# Altium PCB AMS_Slave_Passiv_V2.PcbDoc (part 1 of 2)
Units mm, origin at the board's own origin, x right, y up, seen from the top; angles counter-clockwise.
Board outline 190.4 x 70.05 mm, 4 copper layers (Top Layer, Int1, Int2, Bottom Layer), stack 1.369 mm thick; 116 components, 109 nets, 357 pads, 142 vias.
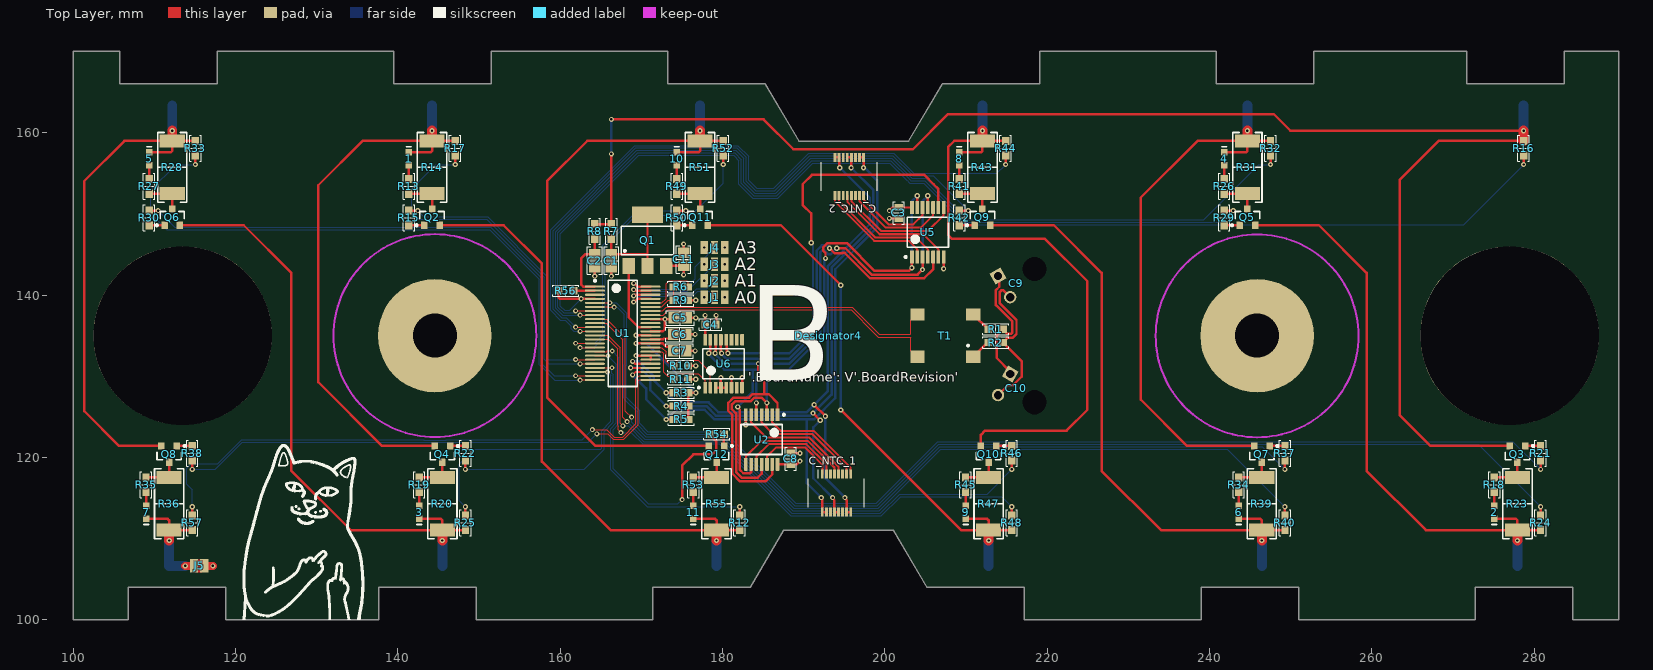
[diagram p0: Top Layer view]
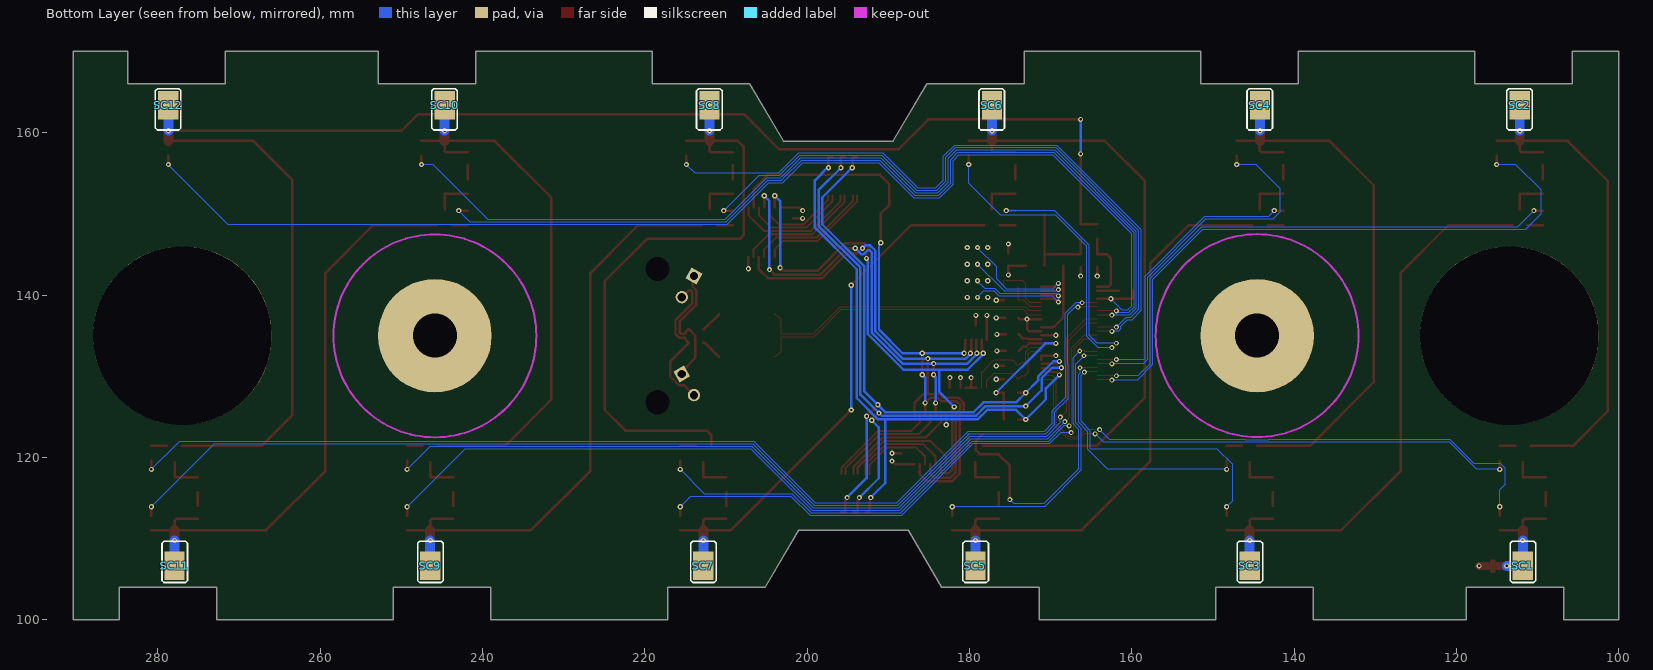
[diagram p1: Bottom Layer view, seen from below]
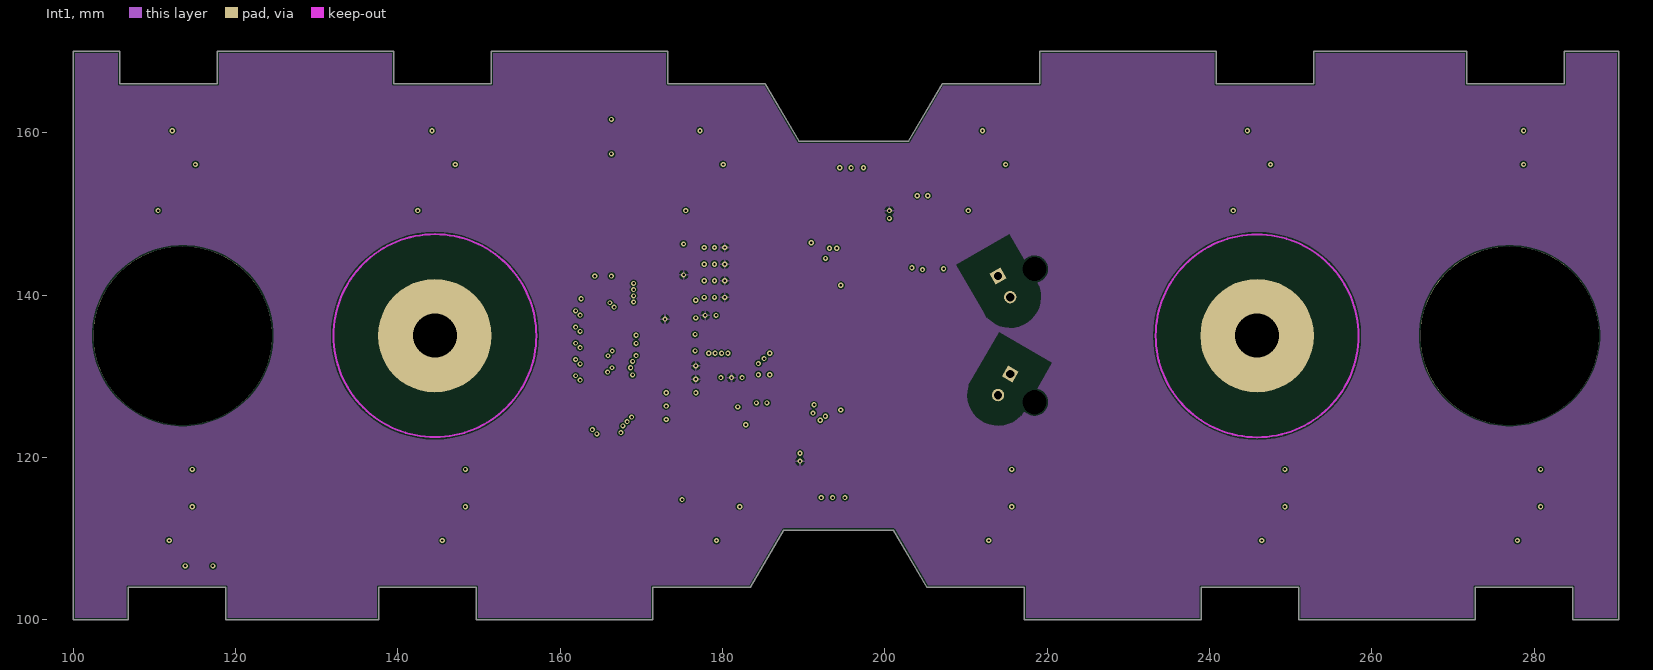
[diagram p2: Int1]
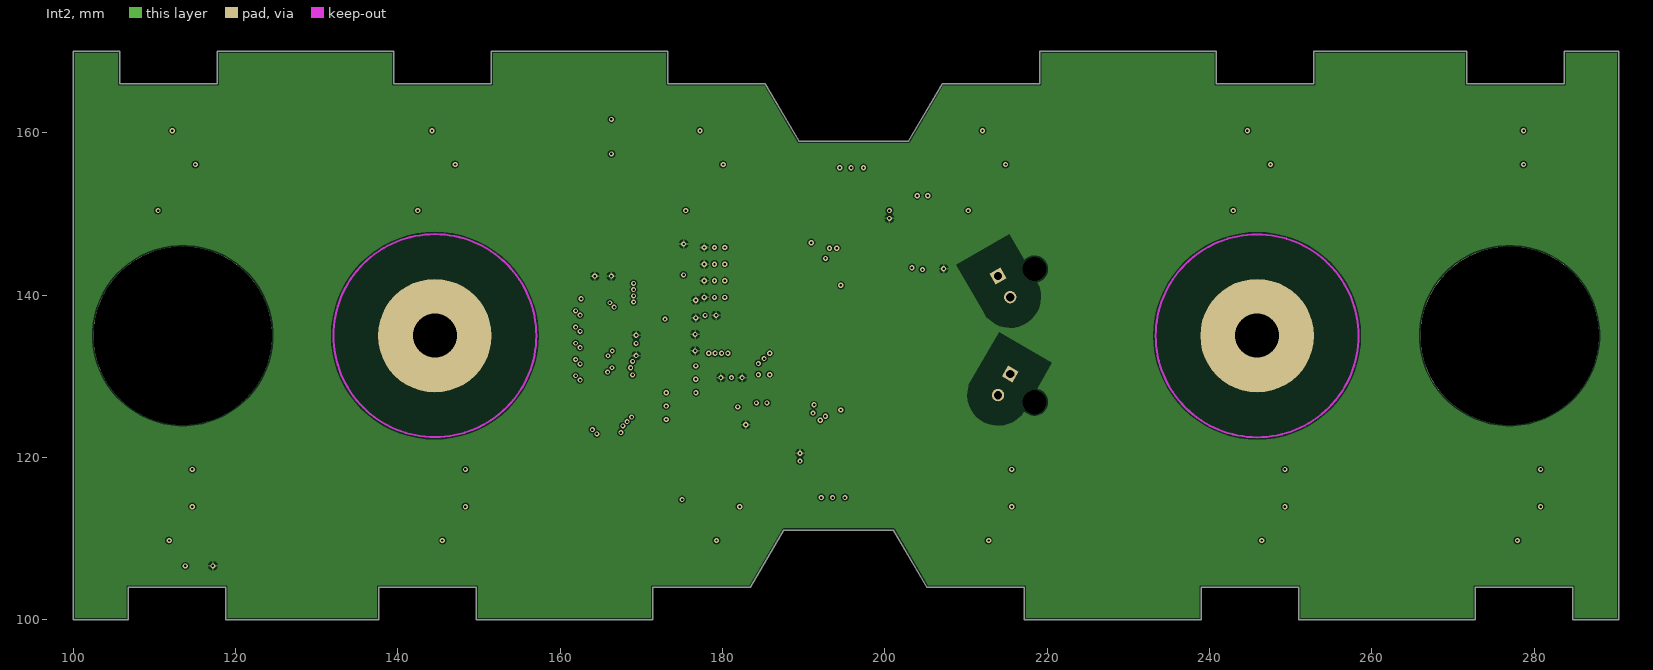
[diagram p3: Int2]
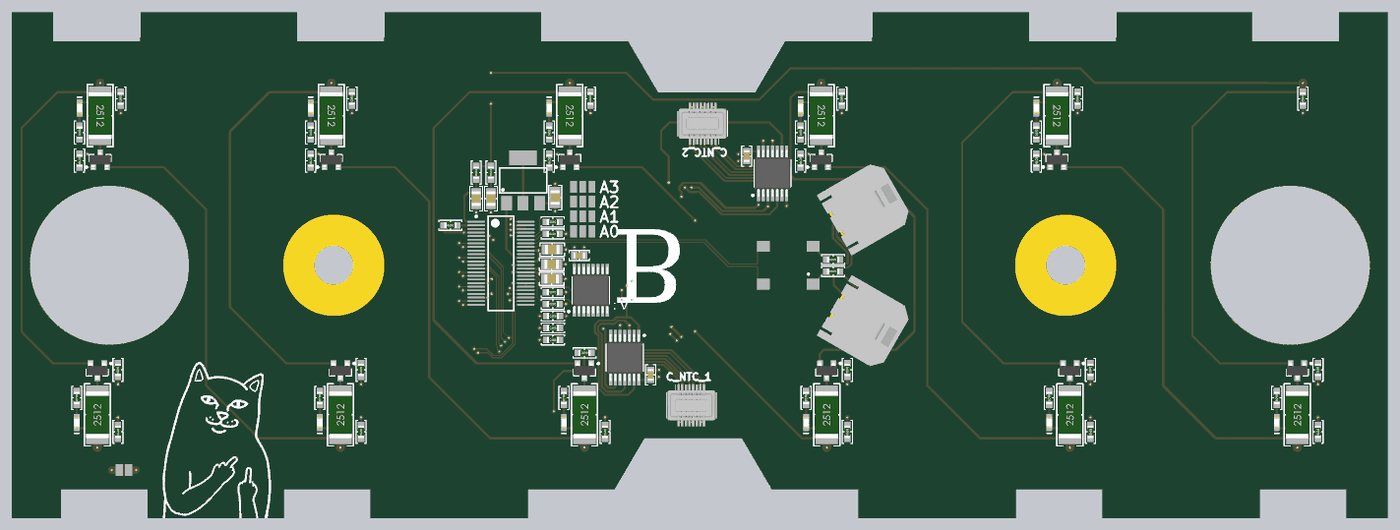
[diagram p5: 3D render of the assembled board from above, using the file's embedded part models]

## Layer stack, top to bottom
Top Solder: solder mask 0.0254, SM-001, Dk 4
Top Layer: signal copper 0.035
Dielectric 1: prepreg 0.1295, PP-017, Dk 4.3
Dielectric 2: prepreg 0.1295, PP-017, Dk 4.3
Int1: signal copper 0.035
Dielectric 3: core 0.7112, Core-039, Dk 4.8
Int2: signal copper 0.035
Dielectric 4: prepreg 0.1295, PP-017, Dk 4.3
Dielectric 5: prepreg 0.1295, PP-017, Dk 4.3
Bottom Layer: signal copper 0.035
Bottom Solder: solder mask 0.0254, SM-001, Dk 4

## Board outline
100,100 106.767,100 106.767,104 118.767,104 118.767,100 137.63,100 137.63,104 149.63,104 149.63,100 171.404,100 171.404,104 183.404,104 187.541,111.07 201.041,111.07 205.178,104 217.178,104 217.178,100 238.952,100 238.952,104 250.952,104 250.952,100 272.726,100 272.726,104 284.726,104 284.726,100 290.4,100 290.4,170.05 283.663,170.05 283.663,166.05 271.664,166.05 271.664,170.05 252.816,170.05 252.816,166.05 240.816,166.05 240.816,170.05 219.042,170.05 219.042,166.05 207.042,166.05 202.905,158.98 189.405,158.98 185.268,166.05 173.268,166.05 173.268,170.05 151.494,170.05 151.494,166.05 139.494,166.05 139.494,170.05 117.72,170.05 117.72,166.05 105.72,166.05 105.72,170.05 100,170.05

## Design rules (kind name [scope] priority, off if disabled: settings)
AcuteAngle [All] p1: minimum=4.50000000000000E+0001 checktracksonly=TRUE
BoardOutlineClearance [All] p1: gap=0.254 ignorepadtopadclearanceinfootprint=FALSE except(0: Arc-SplitContinuation Track-SplitContinuation SMDPad-SplitContinuation THPad-SplitContinuation Via-SplitContinuation Fill-SplitContinuation Poly-SplitContinuation Region-SplitContinuation Text-SplitContinuation)
Clearance Clearance_isoSPI [InNet('isoSPI_iso*') vs Not InNet('isoSPI_iso*') And InAnyNet] p1: gap=3 ignorepadtopadclearanceinfootprint=FALSE
Clearance [All] p2: gap=0.152 ignorepadtopadclearanceinfootprint=FALSE
ComponentClearance [All] p1: gap=0.1 collisioncheckmode=3 verticalgap=0.254 showdistances=FALSE
DiffPairsRouting [All] p1: maxlimit=0.254 minlimit=0.2 mostfreqgap=0.2 toplayer_minwidth=0.152 toplayer_maxwidth=0.381 toplayer_prefwidth=0.305 midlayer1_minwidth=0.152 midlayer1_maxwidth=0.381 midlayer1_prefwidth=0.305 midlayer2_minwidth=0.152 midlayer2_maxwidth=0.381 midlayer2_prefwidth=0.305 bottomlayer_minwidth=0.152 bottomlayer_maxwidth=0.381 bottomlayer_prefwidth=0.305 maxuncoupledlength=12.7
HoleSize [All] p1: absolutevalues=TRUE maxlimit=7 minlimit=0.2 maxpercent=80.000 minpercent=20.000
MinimumAnnularRing [All] p1: minimumring=0.17
MinimumSolderMaskSliver [All] p1: minsoldermaskwidth=0.1
PolygonConnect [All] p1: connectstyle=Relief reliefconductorwidth=0.254 reliefentries=4 polygonreliefangle="90 Angle" airgapwidth=0.254
RoutingVias [All] p1: holewidth=0.3 width=0.64 viastyle="Through Hole" minholewidth=0.3 minwidth=0.61 maxholewidth=0.711 maxwidth=1.27
SMDEntry [not IsRoundPad] p1: side=TRUE corner=TRUE anyangle=TRUE
SMDToCorner [All] p1: distance=60000
SilkToSilkClearance [All] p1: silktosilkclearance=0.2
SilkToSolderMaskClearance [IsPad] p1: minsilkscreentomaskgap=0.3 clearancetoexposedcopper=TRUE
SolderMaskExpansion SolderMaskExpansion_ViaTenting [IsVia] p1: expansion=0 istentingtop=TRUE
SolderMaskExpansion [All] p2: expansion=0 istentingtop=FALSE
UnRoutedNet [All] p1: checkbadconnections=TRUE
Width [All] p1: maxlimit=1.219 minlimit=0.152 preferedwidth=0.305
23 further rules are at their usual default settings.

## Classes and differential pairs
component class AMS_Slave_Measurement: 1 2 3 4 5 6 7 8 9 10 11 J5 Q2 Q3 Q4 Q5 Q6 Q7 Q8 Q9 Q10 Q11 Q12 R12 R13 R14 R15 R16 R17 R18 R19 R20 R21 R22 R23 R24 R25 R26 R27 R28 R29 R30 R31 R32 R33 R34 R35 R36 R37 R38 R39 R40 R41 R42 R43 R44 R45 R46 R47 R48 R49 R50 R51 R52 R53 R54 R55 R56 R57
component class AMS_Slave_Inputs: C9 C10 C_NTC_1 C_NTC_2 SC1 SC2 SC3 SC4 SC5 SC6 SC7 SC8 SC9 SC10 SC11 SC12
component class AMS_Slave_Controller: C1 C2 C3 C4 C5 C6 C7 C8 C11 J1 J2 J3 J4 Q1 R1 R2 R3 R4 R5 R6 R7 R8 R9 R10 R11 T1 U1 U2 U5 U6
differential pair isoSPI_iso: +isoSPI_iso_P -isoSPI_iso_N
differential pair isoSPIonboard: +isoSPIonboard_P -isoSPIonboard_N

## Components (designator, comment, footprint, x,y, rotation, side; value= is the part's Value field where it differs from the comment)
1 "150060GS75000" 0603_A 141.346,156.801 r270 top
2 "150060GS75000" 0603_A 275.077,113.249 r90 top
3 "150060GS75000" 0603_A 142.616,113.249 r90 top
4 "150060GS75000" 0603_A 241.803,156.801 r270 top
5 "150060GS75000" 0603_A 109.342,156.801 r270 top
6 "150060GS75000" 0603_A 243.581,113.249 r90 top
7 "150060GS75000" 0603_A 108.961,113.249 r90 top
8 "150060GS75000" 0603_A 209.164,156.801 r270 top
9 "150060GS75000" 0603_A 209.926,113.249 r90 top
10 "150060GS75000" 0603_A 174.366,156.801 r270 top
11 "150060GS75000" 0603_A 176.398,113.249 r90 top
C1 "SMD Capacitor" "CAP 0805/2012" 166.294,144.256 r90 top value=100n
C2 "SMD Capacitor" "CAP 0805/2012" 164.244,144.256 r90 top value=100n
C3 "SMD Capacitor" "CAP 0603/1608" 201.695,150.13 r90 top value=100n
C4 "SMD Capacitor" "CAP 0603/1608" 178.519,136.369 r180 top value=100n
C5 "SMD Capacitor" "CAP 0805/2012" 174.778,137.203 r0 top value=1u
C6 "SMD Capacitor" "CAP 0805/2012" 174.702,135.171 r0 top value=1u
C7 "SMD Capacitor" "CAP 0805/2012" 174.702,133.139 r0 top value=1u
C8 "SMD Capacitor" "CAP 0603/1608" 188.392,119.847 r270 top value=100n
C9 "43045-0200" 43650-0200 214.68,141.06 r120 top
C10 "43045-0200" 43650-0200 214.68,128.99 r60 top
C11 "SMD Capacitor" "CAP 0805/2012" 175.195,144.406 r90 top value=1u
C_NTC_1 "541020164" 541020164 192.278,115.57 r0 top
C_NTC_2 "541020164" 541020164 197.358,154.686 r180 top
Designator4 "Comment" LOGO_BALTIC_20mm 193.027,135.025 r0 top
J1 "A0" SMD-JUMPER-3 179.002,139.725 r0 top
J2 "A1" SMD-JUMPER-3 179.002,141.775 r0 top
J3 "A2" SMD-JUMPER-3 179.002,143.825 r0 top
J4 "A3" SMD-JUMPER-3 179.002,145.876 r0 top
J5 "SMD Jumper closed" SMD-JUMPER-CLOSED 115.5,106.65 r180 top net-tie
Q1 "NSV1C201MZ4T1G" ONSC-SOT-223-4-318E-04_V 170.744,146.756 r90 top
Q2 "DMP3098L-7" DIOD-SOT23-3_V 144.196,149.619 r90 top
Q3 "DMP3098L-7" DIOD-SOT23-3_V 277.927,120.431 r270 top
Q4 "DMP3098L-7" DIOD-SOT23-3_V 145.466,120.431 r270 top
Q5 "DMP3098L-7" DIOD-SOT23-3_V 244.653,149.619 r90 top
Q6 "DMP3098L-7" DIOD-SOT23-3_V 112.192,149.619 r90 top
Q7 "DMP3098L-7" DIOD-SOT23-3_V 246.431,120.431 r270 top
Q8 "DMP3098L-7" DIOD-SOT23-3_V 111.811,120.431 r270 top
Q9 "DMP3098L-7" DIOD-SOT23-3_V 212.014,149.619 r90 top
Q10 "DMP3098L-7" DIOD-SOT23-3_V 212.776,120.431 r270 top
Q11 "DMP3098L-7" DIOD-SOT23-3_V 177.216,149.619 r90 top
Q12 "DMP3098L-7" DIOD-SOT23-3_V 179.248,120.431 r270 top
R1 "SMD Resistor" "STACKPOLE CSR0603" 213.665,135.814 r180 top value=22
R2 "SMD Resistor" "STACKPOLE CSR0603" 213.665,134.163 r180 top value=22
R3 "SMD Resistor" "STACKPOLE CSR0603" 174.878,127.988 r0 top value=100k
R4 "SMD Resistor" "STACKPOLE CSR0603" 174.878,126.338 r0 top value=100k
R5 "SMD Resistor" "STACKPOLE CSR0603" 174.878,124.688 r0 top value=100k
R6 "SMD Resistor" "STACKPOLE CSR0603" 174.856,141.02 r180 top value=1k
R7 "SMD Resistor" "STACKPOLE CSR0603" 166.294,147.857 r90 top value=100
R8 "SMD Resistor" "STACKPOLE CSR0603" 164.244,147.857 r90 top value=100
R9 "SMD Resistor" "STACKPOLE CSR0603" 174.856,139.37 r0 top value=1k
R10 "SMD Resistor" "STACKPOLE CSR0603" 174.856,131.289 r180 top value=1k
R11 "SMD Resistor" "STACKPOLE CSR0603" 174.856,129.638 r180 top value=1k
R12 "Value" "STACKPOLE CSR0603" 182.098,111.949 r90 top value=100
R13 "SMD Resistor" "STACKPOLE CSR0603" 141.346,153.401 r90 top value=100
R14 "SMD Resistor" "STACKPOLE CSRN2512" 144.196,155.751 r270 top value=10
R15 "SMD Resistor" "STACKPOLE CSR0603" 141.346,149.519 r90 top value=3k3
R16 "Value" "STACKPOLE CSR0603" 278.689,158.101 r270 top value=100
R17 "Value" "STACKPOLE CSR0603" 147.046,158.101 r270 top value=100
R18 "SMD Resistor" "STACKPOLE CSR0603" 275.077,116.649 r270 top value=100
R19 "SMD Resistor" "STACKPOLE CSR0603" 142.616,116.649 r270 top value=100
R20 "SMD Resistor" "STACKPOLE CSRN2512" 145.466,114.299 r90 top value=10
R21 "SMD Resistor" "STACKPOLE CSR0603" 280.777,120.531 r270 top value=3k3
R22 "SMD Resistor" "STACKPOLE CSR0603" 148.316,120.531 r270 top value=3k3
R23 "SMD Resistor" "STACKPOLE CSRN2512" 277.927,114.299 r90 top value=10
R24 "Value" "STACKPOLE CSR0603" 280.777,111.949 r90 top value=100
R25 "Value" "STACKPOLE CSR0603" 148.316,111.949 r90 top value=100
R26 "SMD Resistor" "STACKPOLE CSR0603" 241.803,153.401 r90 top value=100
R27 "SMD Resistor" "STACKPOLE CSR0603" 109.342,153.401 r90 top value=100
R28 "SMD Resistor" "STACKPOLE CSRN2512" 112.192,155.751 r270 top value=10
R29 "SMD Resistor" "STACKPOLE CSR0603" 241.803,149.519 r90 top value=3k3
R30 "SMD Resistor" "STACKPOLE CSR0603" 109.342,149.519 r90 top value=3k3
R31 "SMD Resistor" "STACKPOLE CSRN2512" 244.653,155.751 r270 top value=10
R32 "Value" "STACKPOLE CSR0603" 247.503,158.101 r270 top value=100
R33 "Value" "STACKPOLE CSR0603" 115.042,158.101 r270 top value=100
R34 "SMD Resistor" "STACKPOLE CSR0603" 243.581,116.649 r270 top value=100
R35 "SMD Resistor" "STACKPOLE CSR0603" 108.961,116.649 r270 top value=100
R36 "SMD Resistor" "STACKPOLE CSRN2512" 111.811,114.299 r90 top value=10
R37 "SMD Resistor" "STACKPOLE CSR0603" 249.281,120.531 r270 top value=3k3
R38 "SMD Resistor" "STACKPOLE CSR0603" 114.661,120.531 r270 top value=3k3
R39 "SMD Resistor" "STACKPOLE CSRN2512" 246.431,114.299 r90 top value=10
R40 "Value" "STACKPOLE CSR0603" 249.281,111.949 r90 top value=100
R41 "SMD Resistor" "STACKPOLE CSR0603" 209.164,153.401 r90 top value=100
R42 "SMD Resistor" "STACKPOLE CSR0603" 209.164,149.519 r90 top value=3k3
R43 "SMD Resistor" "STACKPOLE CSRN2512" 212.014,155.751 r270 top value=10
R44 "Value" "STACKPOLE CSR0603" 214.864,158.101 r270 top value=100
R45 "SMD Resistor" "STACKPOLE CSR0603" 209.926,116.649 r270 top value=100
R46 "SMD Resistor" "STACKPOLE CSR0603" 215.626,120.531 r270 top value=3k3
R47 "SMD Resistor" "STACKPOLE CSRN2512" 212.776,114.299 r90 top value=10
R48 "Value" "STACKPOLE CSR0603" 215.626,111.949 r90 top value=100
R49 "SMD Resistor" "STACKPOLE CSR0603" 174.366,153.401 r90 top value=100
R50 "SMD Resistor" "STACKPOLE CSR0603" 174.366,149.519 r90 top value=3k3
R51 "SMD Resistor" "STACKPOLE CSRN2512" 177.216,155.751 r270 top value=10
R52 "Value" "STACKPOLE CSR0603" 180.066,158.101 r270 top value=100
R53 "SMD Resistor" "STACKPOLE CSR0603" 176.398,116.649 r270 top value=100
R54 "SMD Resistor" "STACKPOLE CSR0603" 179.248,122.881 r180 top value=3k3
R55 "SMD Resistor" "STACKPOLE CSRN2512" 179.248,114.299 r90 top value=10
R56 "Value" "STACKPOLE CSR0603" 160.691,140.556 r0 top value=0
R57 "Value" "STACKPOLE CSR0603" 114.661,111.949 r90 top value=100
SC1 "Spring contact for BMS Slave" "1734300-1 Spring Contact" 111.811,106.5 r180 bottom locked
SC2 "Spring contact for BMS Slave" "1734300-1 Spring Contact" 112.192,163.55 r0 bottom locked
SC3 "Spring contact for BMS Slave" "1734300-1 Spring Contact" 145.466,106.5 r180 bottom locked
SC4 "Spring contact for BMS Slave" "1734300-1 Spring Contact" 144.196,163.55 r0 bottom locked
SC5 "Spring contact for BMS Slave" "1734300-1 Spring Contact" 179.248,106.5 r180 bottom locked
SC6 "Spring contact for BMS Slave" "1734300-1 Spring Contact" 177.216,163.55 r0 bottom locked
SC7 "Spring contact for BMS Slave" "1734300-1 Spring Contact" 212.776,106.5 r180 bottom locked
SC8 "Spring contact for BMS Slave" "1734300-1 Spring Contact" 212.014,163.55 r0 bottom locked
SC9 "Spring contact for BMS Slave" "1734300-1 Spring Contact" 246.431,106.5 r180 bottom locked
SC10 "Spring contact for BMS Slave" "1734300-1 Spring Contact" 244.653,163.55 r0 bottom locked
SC11 "Spring contact for BMS Slave" "1734300-1 Spring Contact" 277.927,106.5 r180 bottom locked
SC12 "Spring contact for BMS Slave" "1734300-1 Spring Contact" 278.689,163.55 r0 bottom locked
T1 "750110055" Wuerth_750110055 207.441,135.015 r180 top
U1 "LTC6804IG-2#TRPBF" LT-G-48_M 167.691,135.306 r0 top
U2 "SN74LVC06APWR" PW0014A_M 184.809,122.222 r270 top
U5 "SN74LVC06APWR" PW0014A_M 205.278,147.755 r90 top
U6 "SN74HC138PW" PW0016A_N 180.119,131.562 r90 top

## Footprints (in the part's own frame and the unit in brackets; to place one, negate y for a bottom-side part, rotate by r counter-clockwise, add the part's x,y. Pads: shape width x height; smd on the part's side, far side on the other; paste and mask are expansions set on the pad)
0603_A [mm] "Chip LED, 2-Leads, Body 1.6x0.8mm, IPC Medium Density"
  rect 0.8x0.8 smd: 1(-0.8,0) 2(0.8,0)
  silkscreen extent -1.5,-0.3 -1.5,0.3, body extent -0.8,-0.4 0.8,0.4, height 0.7
43650-0200 [mm] "Micro-Fit 3.0 Right Angle Header, 3.00mm Pitch, Single Row, 2 Circuits"
  rect 1.524x1.524 hole 1.02: 1(1.5,0)
  round 1.524 hole 1.02: 2(-1.5,0)
  round 0 hole 3 unplated: ""(0,-4.32)
  body extent -4.83,-8.9 4.83,1, height 5.64
"1734300-1 Spring Contact" [mm]
  rect 2.5x3.5 smd: 1(0,0.15)
  silkscreen extent -1.55,-1.9 1.6,3.2, body extent -1.25,-1.6 1.25,2.9, height 3
541020164 [mm] "0.50mm Pitch SlimStack Receptacle, Surface Mount, Dual Row, Vertical, 2.50mm Stacking Height, Gold Plating with Nickel Barrier, 16 Circuits"
  rect 0.35x1.1 smd mask+0.05: 1(0,2.4) 2(0,-2.3) 3(0.5,2.4) 4(0.5,-2.3) 5(1,2.4) 6(1,-2.3) 7(1.5,2.4) 8(1.5,-2.3) 9(2,2.4) 10(2,-2.3) 11(2.5,2.4) 12(2.5,-2.3) 13(3,2.4) 14(3,-2.3) 15(3.5,2.4) 16(3.5,-2.3)
  silkscreen extent -1.7,-1.7 5.2,2.9, body extent -1.55,-2.6 5.05,2.7, height 2.1
"CAP 0603/1608" [mm] "Chip Capacitor, 2-Leads, Body 1.60x0.80mm, IPC Medium Density"
  rect 0.9x1 smd: 1(-0.675,0) 2(0.675,0)
  silkscreen extent -1.4,-0.7 1.4,0.7, body extent -0.8,-0.41 0.8,0.41, height 0.82
"CAP 0805/2012" [mm] "Chip Capacitor, 2-Leads, Body 2.00x1.20mm, IPC Medium Density"
  rect 1.3x1.4 smd: 1(-0.8,0) 2(0.8,0)
  silkscreen extent -1.7,-0.9 1.7,0.9, body extent -1,-0.64 1,0.64, height 1.26
DIOD-SOT23-3_V [mm] "SOT23, 3-Leads, Body 3x1.4mm, Pitch 0.95mm"
  rect 0.9x0.8 smd: 1(-1,0.95) 2(-1,-0.95) 3(1,0)
  silkscreen extent -1.12,-1.5 0.7,2.02, body extent -1.25,-1.5 1.25,1.5, height 1.1
LOGO_BALTIC_20mm [mm]
LT-G-48_M [mm] "SOP, 48-Leads, Body 13.1x5.6mm, Pitch 0.5mm, IPC Low Density"
  oval 2.45x0.25 smd: 1(-3.425,5.75) 2(-3.425,5.25) 3(-3.425,4.75) 4(-3.425,4.25) 5(-3.425,3.75) 6(-3.425,3.25) 7(-3.425,2.75) 8(-3.425,2.25) 9(-3.425,1.75) 10(-3.425,1.25) 11(-3.425,0.75) 12(-3.425,0.25) 13(-3.425,-0.25) 14(-3.425,-0.75) 15(-3.425,-1.25) 16(-3.425,-1.75) 17(-3.425,-2.25) 18(-3.425,-2.75) 19(-3.425,-3.25) 20(-3.425,-3.75) 21(-3.425,-4.25) 22(-3.425,-4.75) 23(-3.425,-5.25) 24(-3.425,-5.75) 25(3.425,-5.75) 26(3.425,-5.25) 27(3.425,-4.75) 28(3.425,-4.25) 29(3.425,-3.75) 30(3.425,-3.25) 31(3.425,-2.75) 32(3.425,-2.25) 33(3.425,-1.75) 34(3.425,-1.25) 35(3.425,-0.75) 36(3.425,-0.25) 37(3.425,0.25) 38(3.425,0.75) 39(3.425,1.25) 40(3.425,1.75) 41(3.425,2.25) 42(3.425,2.75) 43(3.425,3.25) 44(3.425,3.75) 45(3.425,4.25) 46(3.425,4.75) 47(3.425,5.25) 48(3.425,5.75)
  silkscreen extent -3.55,-6.55 1.8,6.6, body extent -2.8,-6.55 2.8,6.55, height 2
ONSC-SOT-223-4-318E-04_V [mm] "SOT223, 4-Leads, Body 6.5x3.5mm, Pitch 2.3mm"
  rect 2x1.5 smd: 1(-3.15,2.3) 2(-3.15,0) 3(-3.15,-2.3)
  rect 2x3.8 smd: 4(3.15,0)
  silkscreen extent -1.75,-3.25 1.75,3.25, body extent -1.75,-3.25 1.75,3.25, height 1.75
PW0014A_M [mm] "SOP, 14-Leads, Body 5.1x4.5mm, Pitch 0.65mm, IPC Low Density"
  rrect22% 1.6x0.45 smd: 1(-3.05,1.95) 2(-3.05,1.3) 3(-3.05,0.65) 4(-3.05,0) 5(-3.05,-0.65) 6(-3.05,-1.3) 7(-3.05,-1.95) 8(3.05,-1.95) 9(3.05,-1.3) 10(3.05,-0.65) 11(3.05,0) 12(3.05,0.65) 13(3.05,1.3) 14(3.05,1.95)
  silkscreen extent -3.17,-2.55 1.85,2.85, body extent -3.21,-2.5 3.21,2.5, height 1
PW0016A_N [mm] "SOP, 16-Leads, Body 5.1x4.5mm, Pitch 0.65mm, IPC Medium Density"
  rrect22% 1.4x0.45 smd: 1(-2.95,2.275) 2(-2.95,1.625) 3(-2.95,0.975) 4(-2.95,0.325) 5(-2.95,-0.325) 6(-2.95,-0.975) 7(-2.95,-1.625) 8(-2.95,-2.275) 9(2.95,-2.275) 10(2.95,-1.625) 11(2.95,-0.975) 12(2.95,-0.325) 13(2.95,0.325) 14(2.95,0.975) 15(2.95,1.625) 16(2.95,2.275)
  silkscreen extent -3.07,-2.55 1.85,3.17, body extent -3.21,-2.5 3.21,2.5, height 1
SMD-JUMPER-3 [mm] "Jumper, SMD"
  rect 0.9x1.65 smd: 1(-1.27,0) 2(0,0) 3(1.27,0)
SMD-JUMPER-CLOSED [mm] "Jumper, SMD"
  rect 1x1.65 smd: 1(-0.635,0) 2(0.635,0)
  Top Layer region: -0.35,-0.8 0.35,-0.8 0.35,0.8 -0.35,0.8
"STACKPOLE CSR0603" [mm] "Chip Resistor, 2-Leads, Body 1.60x0.80mm, IPC Medium Density"
  rect 1x0.9 smd: 1(-0.9,0) 2(0.9,0)
  silkscreen extent -1.6,-0.7 1.6,0.7, body extent -0.85,-0.4 0.85,0.4, height 0.45
"STACKPOLE CSRN2512" [mm] "Chip Resistor, 2-Leads, Body 6.40x3.20mm, IPC Medium Density"
  rect 1.6x3.1 smd: 1(-3.25,0) 2(3.25,0)
  silkscreen extent -4.3,-1.8 4.3,1.8, body extent -3.25,-1.58 3.25,1.57, height 0.6
Wuerth_750110055 [mm]
  rect 1.77x1.52 smd: 1(-3.43,2.615) 2(-3.43,-2.615) 3(3.43,-2.615) 4(3.43,2.615)
  silkscreen extent -2.89,1.12 -2.69,1.32, body extent -3.81,-3.81 3.81,3.81, height 3.55

## Part data
1 2 3 4 5 6 7 8 9 10 11: library part CMP-1426-00002-1, "SMD mono-color Chip LED, WL-SMCW, Green", Color=Green, Manufacturer="Wuerth Elektronik", ComponentLink1Description="Manufacturer URL", ComponentLink1URL=http://www.we-online.com, ComponentLink2Description=Datasheet, ComponentLink2URL=http://katalog.we-online.com/led/datasheet/150060GS75000.pdf, PackageReference=0603_A, PartNumber=150060GS75000
C1 C2: "Capacitor with multiple Footprints", Voltage=100V
C3 C4 C5 C6 C7 C8 C11: "Capacitor with multiple Footprints", Voltage=6.3V
C9 C10: library part "MicroFit3.0 2-Pin", "Molex Micro-Fit 3.0 2-Pin / 600V / 8.5A"
C_NTC_1 C_NTC_2: "0.50mm Pitch SlimStack Receptacle, Surface Mount, Dual Row, Vertical, 2.50mm Stacking Height, Gold Plating with Nickel Barrier, 16 Circuits"
J1 J2 J3 J4: library part "SMD Jumper 3"
Q1: library part CMP-1048-00450-1, "100 V, 2 A, Low VCE(sat), NPN Transistor, 4-Pin SOT-223, Pb-Free, Tape and Reel", Manufacturer="On Semiconductor", ComponentLink1Description="Manufacturer URL", ComponentLink1URL=http://www.onsemi.com/, ComponentLink2Description=Datasheet, ComponentLink2URL=http://www.onsemi.cn/pub_link/Collateral/NSS1C201MZ4-D.PDF, ComponentLink3Description="Package Specification", ComponentLink3URL=http://www.onsemi.com/pub_link/Collateral/318E-04.PDF, DatasheetVersion="Rev. 4", IC Continuous (A)=2, Mounting Technology="Surface Mount", Note1=0, PackageDescription="4-Pin Small Outline Transistor, Body 6.5 x 3.5 mm, Pitch 2.3 mm", PackageReference=SOT-223-4-318E-04, PackageVersion="Rev. N, 08/2009", Packing="Tape and Reel", PartNumber=NSV1C201MZ4T1G, Polarity=NPN, RoHS=TRUE
Q2 Q3 Q4 Q5 Q6 Q7 Q8 Q9 Q10 Q11 Q12: library part CMP-0697-00001-2, "P-Channel Enhancement Mode MOSFET, -30 V VDS, -55 to 155 degC, 3-Pin SOT23, RoHS, Tape and Reel", Manufacturer="Diodes Inc", Operating Temperature Range="-55 to 150 degC", ComponentLink1Description="Manufacturer URL", ComponentLink1URL=http://www.diodes.com/, ComponentLink2Description=Datasheet, ComponentLink2URL=http://www.diodes.com/datasheets/ds31447.pdf, ComponentLink3Description="Package Specification", ComponentLink3URL=http://www.diodes.com/datasheets/ap02002.pdf, DatasheetVersion="Rev. 8 - 2", IDS (TA="25 degC)=-3.8 A", Mounting Technology="Surface Mount", PackageDescription="3-Pin Small Outline Transistor, Body 1.3 x 2.9 mm, Pitch 0.95 mm", PackageReference=SOT23, PackageVersion="Rev. 75", Packing="Tape and Reel", PartNumber=DMP3098L-7, PD (TA="25 degC)=1.08 W", RDS(on) (Max.) (VGS="4.5 V)=120 mOhm", RoHS=TRUE, VDS="-30 V", VGS="+/- 20 V", VGS(th) (Max.)="-2.1 V"
R1 R2 R3 R4 R5 R6 R7 R8 R9 R10 R11 R13 R14 R15 R18 R19 R20 R21 R22 R23 R26 R27 R28 R29 R30 R31 R34 R35 R36 R37 R38 R39 R41 R42 R43 R45 R46 R47 R49 R50 R51 R53 R54 R55: "Resistor with multiple footprints"
R12 R16 R17 R24 R25 R32 R33 R40 R44 R48 R52 R56 R57: library part "SMD Resistor", "Resistor with multiple footprints"
SC1 SC2 SC3 SC4 SC5 SC6 SC7 SC8 SC9 SC10 SC11 SC12: library part 1734300-1, "PCB Spring Contact, C-Clip, Uncompressed Height 3 mm [.118 in], Length 4.5 mm [.177 in], Width .098 in [2.5 mm]", Supplier Part Number 1=A118050CT-ND, Supplier 1=Digi-Key
T1: library part Wuerth_Transformer_750110055, "Würth Toroid Transformer 1:1 70µH", Hersteller=Würth, Order Nr.=750312504
U1: library part CMP-0471-00243-1, "Multicell Battery Monitor, 60 V Vin MAX, 48-pin SOP (G-48), -40 to 85 degC, Pb-Free, Tape and Reel", Manufacturer="Linear Technology", Battery Chemistry="Li-Ion, Li-Polymer, NiMH", ComponentLink1Description="Manufacturer URL", ComponentLink1URL=http://www.linear.com/, ComponentLink2Description=Datasheet, ComponentLink2URL=http://cds.linear.com/docs/en/datasheet/680412f.pdf, ComponentLink3Description="Package Specification", ComponentLink3URL=http://cds.linear.com/docs/en/packaging/05081887_0_G48.pdf, Mounting Technology="Surface Mount", Number of Cells="> 1000 V of stacked Li-Ion cells", PackageDescription="48-Pin Plastic SSOP, Body 12.8 x 5.3 mm, Pitch 0.5 mm", PackageReference=G-48, PackageVersion="Rev. Ã˜, 01/2011", Packing="Tape and Reel", PartNumber=LTC6804IG-2#TRPBF, RoHS=TRUE, Type of Charger="Battery Stack Monitor", Vin Max(V)=60
U2 U5: library part CMP-1615-01057-2, "Hex Inverter Buffers/Drivers With Open-Drain Outputs, PW0014A, LARGE T&R", F @ Nom Voltage(Max)(Mhz)=100, Generic Part Number=SN74LVC06A, ICC @ Nom Voltage(Max)(mA)=0.04, Manufacturer="Texas Instruments", Operating Temperature Range(C)="-40 to 125", Rating=Catalog, tpd @ Nom Voltage(Max)(ns)=5.6,3.1,3.9,3.7, Voltage(Nom)(V)=1.8,2.5,2.7,3.3, Bits(#)=6, Code_JEDEC=MO-153, DatasheetVersion=SCAS596N, Input Type=CMOS,TTL, Output Drive (IOL/IOH)(Max)(mA)=-24/24, Output Type=CMOS, PackageReference=PW0014A, Schmitt Trigger=No, Technology Family=LVC, VCC(Max)(V)=3.6, VCC(Min)(V)=1.65
U6: library part CMP-1633-00813-2, "3-Line To 8-Line Decoders/Demultiplexers, PW0016A, TUBE", F @ Nom Voltage(Max)(Mhz)=28, Generic Part Number=SN74HC138, ICC @ Nom Voltage(Max)(mA)=0.08, Manufacturer="Texas Instruments", Operating Temperature Range(C)="-40 to 85", Rating=Catalog, tpd @ Nom Voltage(Max)(ns)=45, Voltage(Nom)(V)=3.3,5, Bits(#)=8, Channels(#)=1, Code_JEDEC=MO-153, Configuration=3：8, DatasheetVersion=SCLS107E, Function=Decoder/Demultiplexer, Input Type=LVTTL/CMOS, Output Drive (IOL/IOH)(Max)(mA)=5.2/-5.2, Output Type=CMOS, PackageReference=PW0016A, Schmitt Trigger=No, Technology Family=HC, Type=Standard, VCC(Max)(V)=6, VCC(Min)(V)=2

## Free pads (board coordinates)
  round 22 hole 22: 1(113.48,135.025) 1(276.951,135.025)
  round 5.4 hole 5.4: 1(144.544,135.035) 1(245.854,135.035)
  round 14 hole 5.2: 2(144.544,135.015) 6(245.854,135.015)

## Via types
v1: diameter 0.64, hole 0.3, Top Layer to Bottom Layer, tented both sides, 114 vias
v2: diameter 0.61, hole 0.3, Top Layer to Bottom Layer, tented both sides, 28 vias

## Nets (pads, with @x,y where several pads share a name; then routed paths per layer and width w, separated by ;. In a path a pad name is that pad's centre, name@x,y a point inside that pad or via, vN(x,y) a via of type N, cw(c..) or ccw(c..) an arc to the next point about the centre after c; other vN are vias at no path point)
+5V: C3.2 C4.2 C5.1 C8.2 C11.1 J1.3 J2.3 J3.3 J4.3 Q1.3 R10.1 R11.1 U1.37 U1.40 U2.14 U5.14 U6.6 U6.16 | length 21.3
  Top Layer w0.305: U1.37@171.116,135.556 172.643,135.556 172.898,135.811 v1(172.898,137.056) ; U1.40@171.116,137.056 v1(172.898,137.056) ; Q1.3@173.044,143.606 C11.1@175.195,143.606 v1(175.195,142.501) ; C5.1@173.978,137.203 173.831,137.056 v1(172.898,137.056) ; R11.1@175.756,129.638 v1(176.683,129.638) ; R10.1@175.756,131.289 v1(176.683,131.289) ; U6.16@177.844,134.512 C4.2@177.844,136.369 v1(177.844,137.512) ; U6.6@181.094,128.612 v1(181.094,129.848) ; U2.14@186.759,119.172 C8.2@188.392,119.172 189.149,119.172 v1(189.535,119.558) ; v1(200.552,150.419) 200.938,150.805 C3.2@201.695,150.805 U5.14@203.328,150.805
  other v1: 180.272,139.725 180.272,141.775 180.272,143.825 180.272,145.876
A0: J1.2 U1.45 | length 13
  Top Layer w0.305: v2(169.037,139.164) 169.137,139.164 169.529,139.556 U1.45@171.116,139.556
  Bottom Layer w0.152: v2(169.037,139.164) 169.723,139.849 176.298,139.849 176.911,140.462 178.265,140.462 v1(179.002,139.725)
A1: J2.2 U1.46 | length 12.9
  Top Layer w0.305: v2(169.037,139.925) 169.168,140.056 U1.46@171.116,140.056
  Bottom Layer w0.152: v2(169.037,139.925) 169.266,140.154 176.172,140.154 176.785,140.766 178.054,140.766 179.002,141.714 v1(179.002,141.775)
A2: J3.2 U1.47 | length 13.6
  Top Layer w0.305: v2(169.037,140.687) 169.168,140.556 U1.47@171.116,140.556
  Bottom Layer w0.152: v2(169.037,140.687) 169.266,140.458 175.637,140.458 179.002,143.823 v1(179.002,143.825)
A3: J4.2 U1.48 | length 15.5
  Top Layer w0.305: v2(169.037,141.448) 169.137,141.448 169.529,141.056 U1.48@171.116,141.056
  Bottom Layer w0.152: v2(169.037,141.448) 169.723,140.763 175.387,140.763 176.657,142.033 176.657,143.53 v1(179.002,145.876)
C00: R57.2 U1.26 | length 71.9
  Top Layer w0.152: v2(163.957,123.444) 165.743,123.444 166.657,122.53 167.673,122.53 169.316,124.173 169.316,129.641 169.731,130.056 U1.26@171.116,130.056
  Top Layer w0.305: R57.2@114.661,112.849 v1(114.661,113.947)
  Bottom Layer w0.152: v1(114.661,113.947) 114.661,116.041 113.982,116.72 113.982,118.681 114.515,119.214 117.768,119.214 120.728,122.174 143.149,122.174 143.163,122.16 145.925,122.16 145.939,122.174 162.687,122.174 v2(163.957,123.444)
C01: R33.2 U1.24 | length 80.2
  Top Layer w0.152: v2(162.433,129.54) 162.449,129.556 U1.24@164.266,129.556
  Top Layer w0.305: v1(115.042,156.103) R33.2@115.042,157.201
  Bottom Layer w0.152: v1(115.042,156.103) 112.669,156.103 109.537,152.971 109.537,150.051 111.506,148.082 151.335,148.082 157.43,141.987 157.43,131.446 157.519,131.357 159.336,129.54 v2(162.433,129.54)
C02: R25.2 U1.22 | length 36.6
  Top Layer w0.152: U1.22@164.266,130.556 164.283,130.54 165.815,130.54 v2(165.831,130.523)
  Top Layer w0.305: R25.2@148.316,112.849 v1(148.316,113.947)
  Bottom Layer w0.152: v1(148.316,113.947) 147.574,114.69 147.574,119.175 149.43,121.031 164.992,121.031 165.081,121.12 165.081,123.312 166.243,124.473 166.243,130.111 v2(165.831,130.523)
C03: R17.2 U1.20 | length 46.8
  Top Layer w0.152: v2@162.449,131.556 U1.20@164.266,131.556
  Top Layer w0.305: v1(147.046,156.103) R17.2@147.046,157.201
  Bottom Layer w0.152: v1(147.046,156.103) 144.673,156.103 141.668,153.098 141.668,150.305 142.619,149.354 150.924,149.354 158.038,142.239 158.038,132.107 158.606,131.54 v2(162.433,131.54)
C04: R12.2 U1.18 | length 35.3
  Top Layer w0.152: U1.18@164.266,132.556 164.274,132.548 165.866,132.548 v2(165.874,132.539)
  Top Layer w0.305: R12.2@182.098,112.849 v1(182.098,113.947)
  Bottom Layer w0.152: v2(165.874,132.539) 166.903,131.511 166.903,124.272 166.193,123.562 166.193,118.492 170.737,113.947 v1(182.098,113.947)
C05: R52.2 U1.16 | length 37.8
  Top Layer w0.152: v2@162.449,133.556 U1.16@164.266,133.556
  Top Layer w0.305: v1(180.066,156.103) R52.2@180.066,157.201
  Bottom Layer w0.152: v2(162.433,133.54) 164.147,133.54 165.531,134.924 165.531,146.051 169.34,149.86 176.149,149.86 180.066,153.777 v1(180.066,156.103)
C06: R48.2 U1.14 | length 68.8
  Top Layer w0.152: U1.14@164.266,134.556 165.914,134.556 167.062,133.407 167.062,123.962 167.167,123.857 167.167,123.425 167.457,123.135 v2(167.457,123.068)
  Top Layer w0.305: R48.2@215.626,112.849 v1(215.626,113.947)
  Bottom Layer w0.152: v2(167.457,123.068) 168.745,123.068 170.145,121.668 179.576,121.668 188.406,112.838 199.573,112.838 201.923,115.189 214.385,115.189 v1(215.626,113.947)
C07: R44.2 U1.12 | length 85.2
  Top Layer w0.152: v2@162.449,135.556 U1.12@164.266,135.556
  Top Layer w0.305: v1(214.864,156.103) R44.2@214.864,157.201
  Bottom Layer w0.152: v2(162.433,135.54) 162.427,135.546 161.674,135.546 161.361,135.858 161.361,136.181 160.611,136.931 160.024,136.931 158.802,138.152 158.802,148.078 169.168,158.444 181.86,158.444 183.209,157.095 183.209,154.178 184.225,153.162 186.309,153.162 190.627,157.48 201.112,157.48 203.553,155.039 213.8,155.039 v1(214.864,156.103)
C08: R40.2 U1.10 | length 107.3
  Top Layer w0.152: U1.10@164.266,136.556 165.643,136.556 167.717,134.483 167.717,124.957 v2(168.244,124.429)
  Top Layer w0.305: R40.2@249.281,112.849 v1(249.281,113.947)
  Bottom Layer w0.152: v2(168.244,124.429) 170.397,122.277 179.828,122.277 188.658,113.447 199.32,113.447 206.904,121.031 242.198,121.031 v1(249.281,113.947)
C09: R32.2 U1.8 | length 119.6
  Top Layer w0.152: v2@162.449,137.556 U1.8@164.266,137.556
  Top Layer w0.305: v1(247.503,156.103) R32.2@247.503,157.201
  Bottom Layer w0.152: v2(162.433,137.54) 160.276,137.54 159.411,138.405 159.411,147.826 169.42,157.835 181.608,157.835 182.6,156.843 182.6,153.926 183.972,152.553 186.561,152.553 190.879,156.871 200.86,156.871 203.122,154.608 203.212,154.519 203.301,154.43 205.008,154.43 210.136,149.303 239.268,149.303 246.068,156.103 v1(247.503,156.103)
C10: R24.2 U1.6 | length 141.2
  Top Layer w0.152: U1.6@164.266,138.556 165.861,138.556 165.878,138.539 v2@166.632,138.539
  Top Layer w0.305: R24.2@280.777,112.849 v1(280.777,113.947)
  Bottom Layer w0.152: v2(166.638,138.533) 167.029,138.533 167.894,137.668 167.894,131.5 167.803,131.409 167.803,127.295 167.894,127.205 169.457,125.642 169.457,124.078 170.649,122.886 180.08,122.886 188.91,114.056 199.068,114.056 206.652,121.64 273.085,121.64 v1(280.777,113.947)
C11: R16.2 R56.1 U1.4 | length 153.3
  Top Layer w0.305: R56.1@159.791,140.556 159.791,139.735 159.969,139.556 v1(162.56,139.556) U1.4@164.266,139.556 ; v1(278.689,156.103) R16.2@278.689,157.201
  Bottom Layer w0.152: v1(162.56,139.556) 161.153,138.149 160.528,138.149 160.02,138.657 160.02,147.574 169.672,157.226 181.356,157.226 181.991,156.591 181.991,153.674 183.72,151.944 186.813,151.944 191.131,156.262 200.608,156.262 202.692,154.178 202.781,154.089 202.87,154 202.959,153.911 203.049,153.821 204.756,153.821 209.883,148.694 271.28,148.694 v1(278.689,156.103)
C12: R56.2 U1.2 | length 2.7
  Top Layer w0.305: R56.2@161.591,140.556 U1.2@164.266,140.556
Cell01+: 5.1 Q8.2 R28.1 R33.1 SC2.1 | length 63.9
  Top Layer w0.305: 5.1@109.342,157.601 112.008,157.601 112.192,157.785 R28.1@112.192,159.001 ; Q8.2@110.861,121.431 105.645,121.431 101.346,125.73 101.346,154.051 106.296,159.001 R28.1@112.192,159.001 ; R33.1@115.042,159.001 R28.1@112.192,159.001
  Top Layer w1.219: R28.1@112.192,159.001 v1(112.192,160.271)
  Bottom Layer w1.219: v1(112.192,160.271) SC2.1@112.192,163.4
Cell01-: 7.1 J5.2 R36.1 R57.1 SC1.1 | length 14.4
  Top Layer w0.305: 7.1@108.961,112.449 111.627,112.449 111.811,112.265 R36.1@111.811,111.049 R57.1@114.661,111.049
  Top Layer w1: v1(113.797,106.65) J5.2@114.865,106.65
  Top Layer w1.219: v1(111.811,109.779) R36.1@111.811,111.049
  Bottom Layer w1.219: v1(111.811,109.779) SC1.1@111.811,106.65 v1(113.797,106.65)
Cell02+: 3.1 Q6.2 R20.1 R25.1 SC3.1 | length 73.6
  Top Layer w0.305: Q6.2@113.142,148.619 121.002,148.619 126.873,142.748 126.873,118.364 134.188,111.049 R20.1@145.466,111.049 ; 3.1@142.616,112.449 145.282,112.449 145.466,112.265 R20.1@145.466,111.049 ; R25.1@148.316,111.049 R20.1@145.466,111.049
  Top Layer w1.219: v1(145.466,109.779) R20.1@145.466,111.049
  Bottom Layer w1.219: SC3.1@145.466,106.65 v1(145.466,109.779)
Cell03+: 1.1 Q4.2 R14.1 R17.1 SC4.1 | length 69.5
  Top Layer w0.305: 1.1@141.346,157.601 144.012,157.601 144.196,157.785 R14.1@144.196,159.001 ; Q4.2@144.516,121.431 138.03,121.431 130.175,129.286 130.175,153.543 135.633,159.001 R14.1@144.196,159.001 ; R17.1@147.046,159.001 R14.1@144.196,159.001
  Top Layer w1.219: R14.1@144.196,159.001 v1(144.196,160.271)
  Bottom Layer w1.219: v1(144.196,160.271) SC4.1@144.196,163.4